# EAGLE board 8ModuleFinal (EAGLE 6.3), part 1 of 2
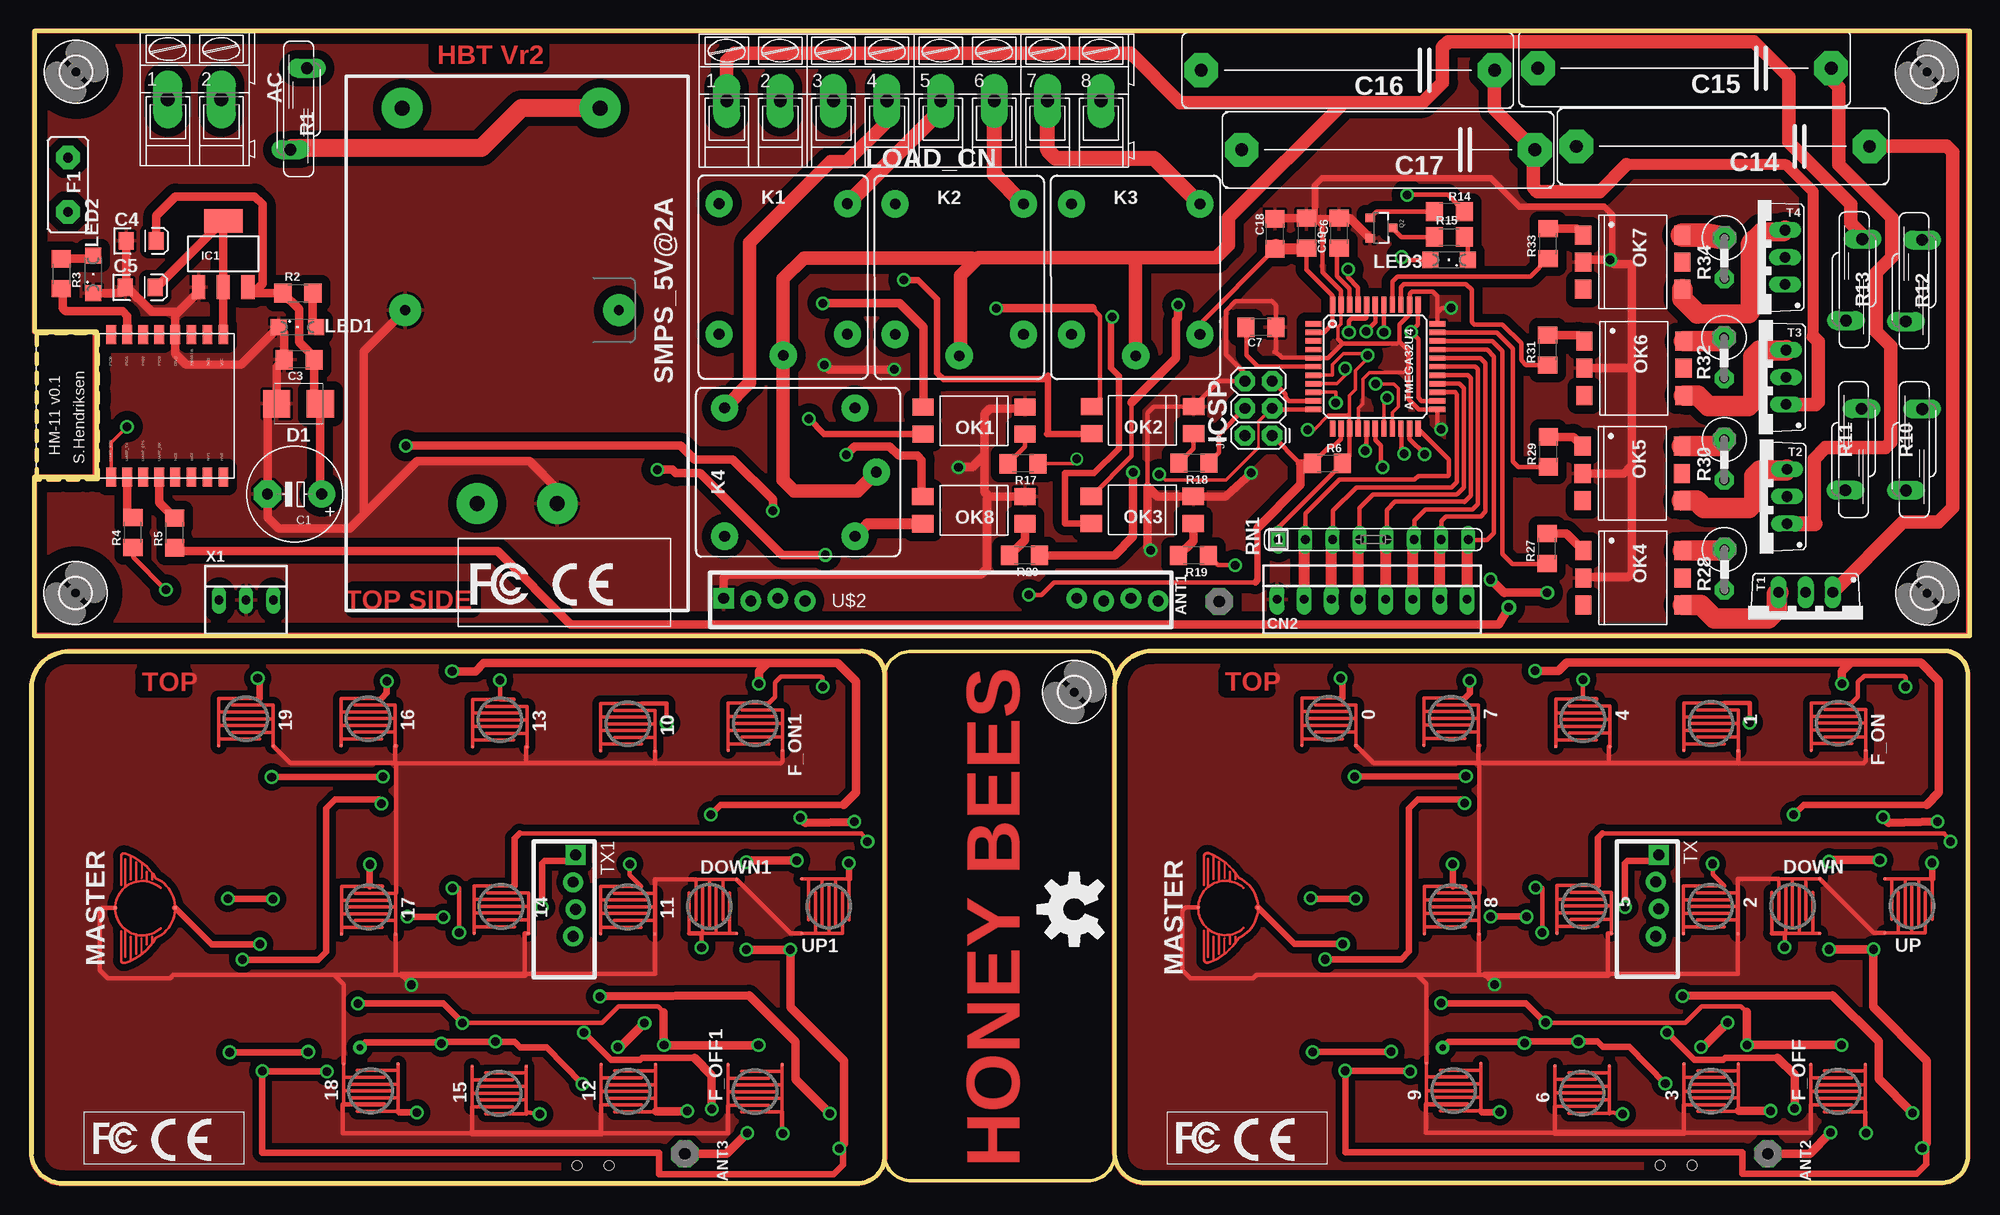
[diagram p0: board, top side]
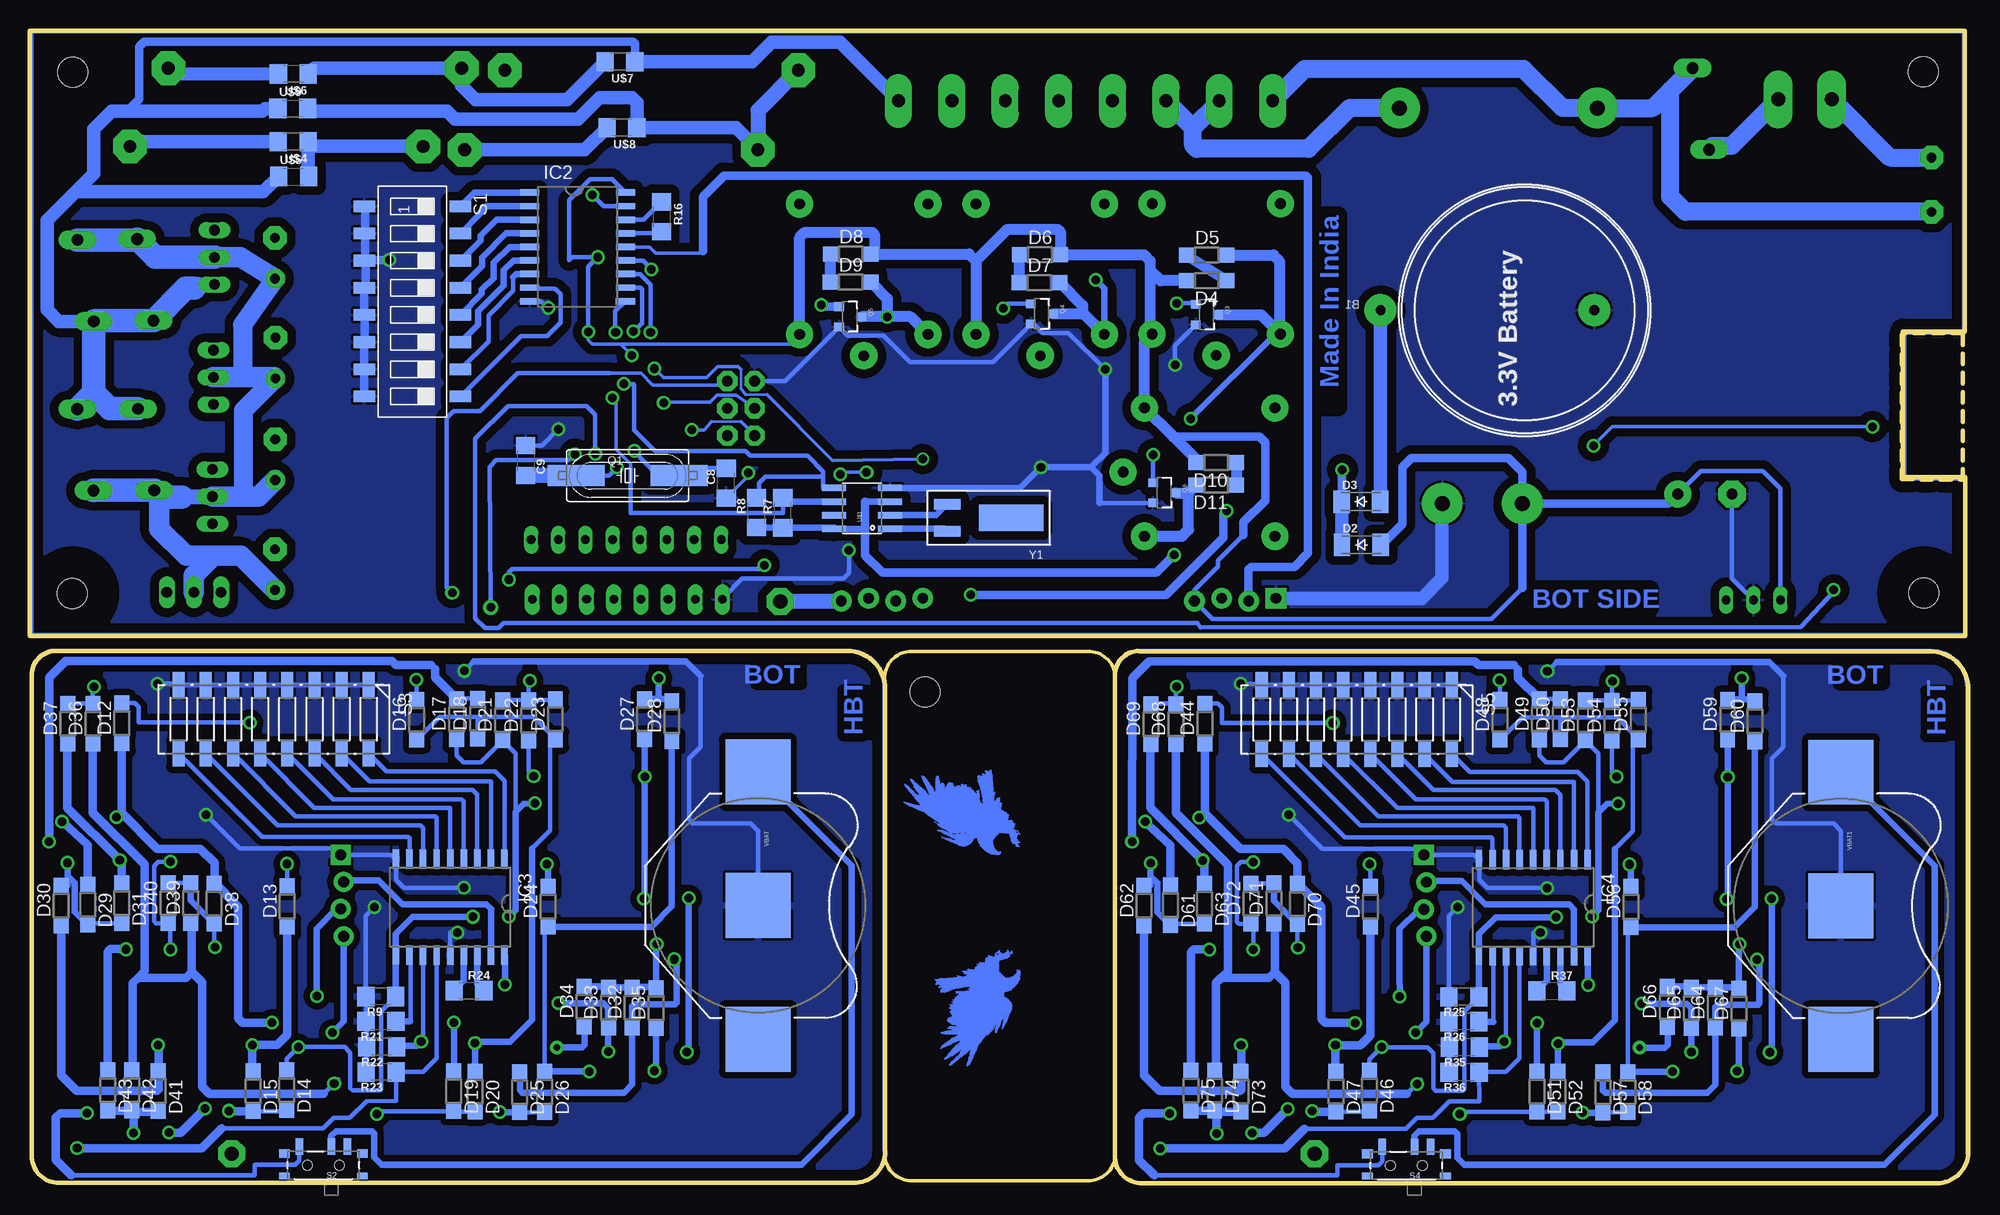
[diagram p1: board, bottom side, seen from below]

Size 181.29 x 107.82 mm. Coordinates in mm from the lower left corner, seen from the top.
Outline: 6.2,79.36 6.2,65.85 0.51,65.82 0.51,79.52 6.12,79.52
Outline: 0.36,107.82 181.29,107.82 181.29,51.17 0.29,51.17 0.29,66.07 6.11,66.07 6.11,79.67 0.31,79.67 0.31,107.8
Outline: 178.82,49.78 104.84,49.78 arc90 101.29,46.23 101.29,2.96 arc90 104.22,0.03 178.59,0.03 arc90 181.1,2.54 181.1,47.57 arc90 178.87,49.8
Outline: 77.53,49.75 3.55,49.75 arc90 0,46.21 0,2.93 arc90 2.93,0 77.3,0 arc90 79.81,2.51 79.81,47.54 arc90 77.58,49.77
Outline: 0.07,47.18 0.07,2.73
Outline: 79.77,47.21 arc-90 82.31,49.75 98.82,49.75 arc-90 101.36,47.21 101.36,2.76 arc-90 98.82,0.22 82.31,0.22 arc-90 79.77,2.76 79.77,47.21
Copper layers (1*16): Top 0.035mm / dielectric 1.5mm / Bottom 0.035mm
Design rules "default": minimum track width 10mil, minimum drill 24mil, track to track 8mil, track to pad 8mil, pad to pad 8mil, via to via 8mil, smd to smd 8mil, copper to edge 40mil, drill to drill 8mil, minimum pad ring 10mil, minimum via ring 8mil, stop-mask expansion 4mil, vias tented up to drill 0mil, thermal gap 10mil

## Footprints (pad centres in the part's own frame; a part is rotated, then mirrored left to right if it is on the bottom)
BUTTON-CONDUCTIVE = smd 0.203 x 0.203: 1 2.54,2.54; 2 2.54,-2.54
AK300/2 = drill 1.321 pad 2.7 long: 1 -2.515,0; 2 2.489,0
PAD-01 = drill 1.321 pad 2.54 octagon: 1 0,0
TQFP44 = smd 1.5 x 0.5: 1 -5.8,4; 2 -5.8,3.2; 3 -5.8,2.4; 4 -5.8,1.6; 5 -5.8,0.8; 6 -5.8,0; 7 -5.8,-0.8; 8 -5.8,-1.6; 9 -5.8,-2.4; 10 -5.8,-3.2; 11 -5.8,-4; 23 5.8,-4; 24 5.8,-3.2; 25 5.8,-2.4; 26 5.8,-1.6; 27 5.8,-0.8; 28 5.8,0; 29 5.8,0.8; 30 5.8,1.6; 31 5.8,2.4; 32 5.8,3.2; 33 5.8,4 | smd 0.5 x 1.5: 12 -4,-5.8; 13 -3.2,-5.8; 14 -2.4,-5.8; 15 -1.6,-5.8; 16 -0.8,-5.8; 17 0,-5.8; 18 0.8,-5.8; 19 1.6,-5.8; 20 2.4,-5.8; 21 3.2,-5.8; 22 4,-5.8; 34 4,5.8; 35 3.2,5.8; 36 2.4,5.8; 37 1.6,5.8; 38 0.8,5.8; 39 0,5.8; 40 -0.8,5.8; 41 -1.6,5.8; 42 -2.4,5.8; 43 -3.2,5.8; 44 -4,5.8
CR2032 = drill 0.9 pad 3: + 10,0; - -10,0
E5-8,5 = drill 1.016 pad 2.54: + -2.54,0 | drill 1.016 pad 2.54 octagon: - 2.54,0
1206 = smd 1.6 x 1.8: 1 -1.4,0; 2 1.4,0
EIA3216 = smd 1.4 x 1.6: A 1.4,0; C -1.4,0
C27.5B9 = drill 1.194 pad 3.15 octagon: 1 -13.716,0; 2 13.716,0
22-23-2081 = drill 0.8 pad 1.422 long: 1 -8.89,0; 2 -6.35,0; 3 -3.81,0; 4 -1.27,0; 5 1.27,0; 6 3.81,0; 7 6.35,0; 8 8.89,0
SMBJ = smd 2.54 x 2.54: A 2.04,0; C -2.03,0
SOD-123_MINI-SMA = smd 1.5 x 2.1: A 1.8,0; C -1.8,0
SOD123 = smd 1.4 x 1.4: A 1.9,0; C -1.9,0
2,8 = hole 2.8: 0,0
MF-5,1B = drill 0.914 pad 2.184 octagon: 1 -2.54,0; 2 2.54,0
SOT223 = smd 1.219 x 2.235: 1 -2.311,-3.099; 2 0,-3.099; 3 2.311,-3.099 | smd 3.6 x 2.2: 4 0,3.099
SOP18 = smd 0.6 x 1.8: 1 -5.08,-4.475; 2 -3.81,-4.475; 3 -2.54,-4.475; 4 -1.27,-4.475; 5 0,-4.475; 6 1.27,-4.475; 7 2.54,-4.475; 8 3.81,-4.475; 9 5.08,-4.475; 10 5.08,4.475; 11 3.81,4.5; 12 2.54,4.5; 13 1.27,4.5; 14 0,4.5; 15 -1.27,4.5; 16 -2.54,4.5; 17 -3.81,4.5; 18 -5.08,4.5
2X3 = drill 1.016 pad 1.88 octagon: 1 0,0; 2 0,2.54; 3 2.54,0; 4 2.54,2.54; 5 5.08,0; 6 5.08,2.54
JS-M = drill 1 pad 2.54: 1 6.7,6; 2 6.7,-6; C 8.7,0; NC -5.5,-6; NO -5.5,6
SML1206 = smd 1.5 x 1.5: A 1.75,0; C -1.75,0
AK300/8 = drill 1.2 pad 2.54 long: 1 -17.501,0; 2 -12.497,0; 3 -7.518,0; 4 -2.515,0; 5 2.515,0; 6 7.518,0; 7 12.497,0; 8 17.501,0
BUTTON-CONDUCTIVE-MINI = smd 0.254 x 0.254: 1 5.08,-0.559; 2 5.08,5.055
DIL4-SMD = smd 1.6 x 2: 1 -1.27,-4.77; 2 1.27,-4.77; 3 1.27,4.77; 4 -1.27,4.77
DIL6-SMD = smd 1.78 x 1.52: 1 -2.54,-4.645; 2 0,-4.645; 3 2.54,-4.645; 4 2.54,4.645; 5 0,4.645; 6 -2.54,4.645
HC49UP = smd 5.334 x 1.93: 1 -4.826,0; 2 4.826,0
SOT23-3 = smd 0.8 x 0.9: 1 -0.95,-1; 2 0.95,-1; 3 0,1.1
S10K11 = drill 1.1 pad 1.778 long: 1 -0.762,-3.81; 2 0.762,3.81
0411V = drill 0.914 pad 2.184 octagon: 1 -2.54,0 | drill 0.914 pad 1.778 octagon: 2 1.27,0
SIL8 = drill 0.813 long: 1 -8.89,0; 2 -6.35,0; 3 -3.81,0; 4 -1.27,0; 5 1.27,0; 6 3.81,0; 7 6.35,0; 8 8.89,0
SMS-008 = smd 1.092 x 2.007: 1 -8.89,-4.496; 2 -6.35,-4.496; 3 -3.81,-4.496; 4 -1.27,-4.496; 5 1.27,-4.496; 6 3.81,-4.496; 7 6.35,-4.496; 8 8.89,-4.496; 9 8.89,4.496; 10 6.35,4.496; 11 3.81,4.496; 12 1.27,4.496; 13 -1.27,4.496; 14 -3.81,4.496; 15 -6.35,4.496; 16 -8.89,4.496
SWITCH-SPST-SMD-A = smd 0.7 x 1.5: 1 -2.25,-1.75; 2 -0.75,-1.75; 3 2.25,-1.75 | smd 1 x 0.6: GND1 -3.65,1; GND3 3.65,1 | smd 1 x 0.8: GND2 -3.65,-1.1; GND4 3.65,-1.1 | hole 0.9: -1.5,0; 1.5,0
CTS-219-08J = smd 1.13 x 2.44: 1 -8.89,-3.215; 2 -6.35,-3.215; 3 -3.81,-3.215; 4 -1.27,-3.215; 5 1.27,-3.215; 6 3.81,-3.215; 7 6.35,-3.215; 8 8.89,-3.215; 9 8.89,3.215; 10 6.35,3.215; 11 3.81,3.215; 12 1.27,3.215; 13 -1.27,3.215; 14 -3.81,3.215; 15 -6.35,3.215; 16 -8.89,3.215
MKS1854-6-0-404 = drill 1.4 pad 3.81: 1 5.25,47; 2 23.75,47; 3 12.25,10; 4 19.75,10
TO220BV = drill 1 pad 1.422 long: G 2.54,-2.54; T1 -2.54,-2.54; T2 0,-2.54
RF-LINK_TX = drill 1.016 pad 1.88: ANT 7.62,-0.127; DATA 2.54,-0.127; VCC 5.08,0.127 | drill 1.016 pad 1.88 square: GND 0,0.127
SO08 = smd 0.61 x 2.21: 1 -1.905,-2.616; 2 -0.635,-2.616; 3 0.635,-2.616; 4 1.905,-2.616; 5 1.905,2.616; 6 0.635,2.616; 7 -0.635,2.616; 8 -1.905,2.616
RF-LINK_RX = drill 1 pad 1.93: +5V@1 7.62,-0.127; +5V@2 33.02,0.127; ANT 40.64,-0.127; DATA@1 2.54,-0.127; DATA@2 5.08,0.127; GND@2 35.56,-0.127; GND@3 38.1,0.127 | drill 1 pad 1.93 square: GND@1 0,0.127
HM-11 = smd 1.778 x 0.914: GND 7.508,-0.6; NC1 -5.808,-0.6; NC2 -5.808,-2.1; NC3 7.508,-3.6; NV1 -5.808,-3.6; NV2 -5.808,-5.1; PIO0 7.508,5.4; PIO1 7.508,3.9; PIO2 7.508,2.4; PIO3 7.508,0.9; RESETB 7.508,-2.1; UART_CTS -5.808,2.4; UART_RTS -5.808,5.4; UART_RX -5.808,0.9; UART_TX -5.808,3.9; VCC 7.508,-5.1
BATTCON_20MM = smd 6.07 x 6.07: 1 -12.5,0; 2 0,0; 3 12.5,0
22-23-2031 = drill 0.8 pad 1.27 long: 1 -2.54,0; 2 0,0; 3 2.54,0
CRYSTAL_CYL_2X6MM_SMT = smd 2.5 x 1: 1 2.125,1.27; 2 2.125,-1.27 | smd 6 x 2.5: CYLINDER -3.875,0

## Placement (x,y rotation side)
0  BUTTON-CONDUCTIVESMD  [BUTTON-CONDUCTIVE]  121.37,43.47 270 top
1  BUTTON-CONDUCTIVESMD  [BUTTON-CONDUCTIVE]  157.09,43 270 top
2  BUTTON-CONDUCTIVESMD  [BUTTON-CONDUCTIVE]  157.07,25.88 270 top
3  BUTTON-CONDUCTIVESMD  [BUTTON-CONDUCTIVE]  157.12,8.62 90 top
4  BUTTON-CONDUCTIVESMD  [BUTTON-CONDUCTIVE]  145.11,43.37 270 top
5  BUTTON-CONDUCTIVESMD  [BUTTON-CONDUCTIVE]  145.24,25.93 270 top
6  BUTTON-CONDUCTIVESMD  [BUTTON-CONDUCTIVE]  145.05,8.44 90 top
7  BUTTON-CONDUCTIVESMD  [BUTTON-CONDUCTIVE]  132.79,43.49 270 top
8  BUTTON-CONDUCTIVESMD  [BUTTON-CONDUCTIVE]  132.84,25.87 270 top
9  BUTTON-CONDUCTIVESMD  [BUTTON-CONDUCTIVE]  133.04,8.66 90 top
10  BUTTON-CONDUCTIVESMD  [BUTTON-CONDUCTIVE]  55.8,42.97 270 top
11  BUTTON-CONDUCTIVESMD  [BUTTON-CONDUCTIVE]  55.78,25.86 270 top
12  BUTTON-CONDUCTIVESMD  [BUTTON-CONDUCTIVE]  55.83,8.59 90 top
13  BUTTON-CONDUCTIVESMD  [BUTTON-CONDUCTIVE]  43.82,43.34 270 top
14  BUTTON-CONDUCTIVESMD  [BUTTON-CONDUCTIVE]  43.95,25.9 270 top
15  BUTTON-CONDUCTIVESMD  [BUTTON-CONDUCTIVE]  43.76,8.41 90 top
16  BUTTON-CONDUCTIVESMD  [BUTTON-CONDUCTIVE]  31.51,43.46 270 top
17  BUTTON-CONDUCTIVESMD  [BUTTON-CONDUCTIVE]  31.55,25.84 270 top
18  BUTTON-CONDUCTIVESMD  [BUTTON-CONDUCTIVE]  31.75,8.64 90 top
19  BUTTON-CONDUCTIVESMD  [BUTTON-CONDUCTIVE]  20.08,43.45 270 top
AC  [AK300/2]  15.29,101.39 0 top
ANT1  [PAD-01]  111.1,54.41 90 top
ANT2  [PAD-01]  162.41,2.77 270 top
ANT3  [PAD-01]  61.13,2.74 270 top
ATMEGA32U4  ATMEGA32U4TQFP-44  [TQFP44]  125.7,76.38 0 top
B1  [CR2032]  44.97,81.66 0 top
C1  470uF/25V  [E5-8,5]  24.63,64.45 180 top
C3  0.1uF  [1206]  25.05,77.03 180 top
C4  10uF  [EIA3216]  10.29,88.15 0 top
C5  10uF  [EIA3216]  10.21,83.8 0 top
C6  0.1uF  [1206]  122.32,88.87 90 top
C7  1uF  [1206]  115,80.06 180 top
C8  18pF  [1206]  116.16,65.47 90 bottom
C9  18pF  [1206]  134.93,67.59 270 bottom
C14  2.2uF/250VAC  [C27.5B9]  158.22,96.99 180 top
C15  3.3uF/250VAC  [C27.5B9]  154.62,104.29 180 top
C16  2.2uF/250VAC  [C27.5B9]  123.14,104.11 180 top
C17  3.3uF/250VAC  [C27.5B9]  126.91,96.66 180 top
C18  0.1uF  [1206]  116.31,88.8 90 top
C19  0.1uF  [1206]  119.28,88.88 270 top
CN2  Capsense I/P  [22-23-2081]  125.41,54.61 0 top
D1  [SMBJ]  25.01,72.91 180 top
D2  CGRM4007-G  [SOD-123_MINI-SMA]  56.76,59.71 0 bottom
D3  CGRM4007-G  [SOD-123_MINI-SMA]  56.8,63.76 0 bottom
D4  [SOD123]  71.21,84.4 180 bottom
D5  [SOD123]  71.22,86.82 0 bottom
D6  [SOD123]  86.82,86.84 0 bottom
D7  [SOD123]  86.86,84.23 0 bottom
D8  [SOD123]  104.5,86.91 0 bottom
D9  [SOD123]  104.53,84.27 0 bottom
D10  [SOD123]  70.35,67.39 180 bottom
D11  [SOD123]  70.35,65.33 180 bottom
D12  [SOD123]  172.69,43.02 90 bottom
D13  [SOD123]  157.21,25.89 90 bottom
D14  [SOD123]  157.28,8.7 270 bottom
D15  [SOD123]  160.42,8.61 270 bottom
D16  [SOD123]  145.1,43.37 90 bottom
D17  [SOD123]  141.39,43.41 90 bottom
D18  [SOD123]  139.42,43.44 90 bottom
D19  [SOD123]  141.63,8.61 270 bottom
D20  [SOD123]  139.65,8.59 270 bottom
D21  [SOD123]  137.09,43.32 90 bottom
D22  [SOD123]  134.64,43.29 90 bottom
D23  [SOD123]  132.14,43.38 90 bottom
D24  [SOD123]  132.83,25.87 90 bottom
D25  [SOD123]  135.48,8.53 270 bottom
D26  [SOD123]  133.14,8.55 270 bottom
D27  [SOD123]  123.8,43.39 90 bottom
D28  [SOD123]  121.25,43.22 90 bottom
D29  [SOD123]  175.88,26.05 270 bottom
D30  [SOD123]  178.36,25.97 90 bottom
D31  [SOD123]  172.71,26.19 270 bottom
D32  [SOD123]  124.95,16.44 90 bottom
D33  [SOD123]  127.18,16.43 90 bottom
D34  [SOD123]  129.45,16.52 90 bottom
D35  [SOD123]  122.73,16.37 90 bottom
D36  [SOD123]  175.38,42.98 90 bottom
D37  [SOD123]  177.74,42.98 90 bottom
D38  [SOD123]  164.04,26.15 270 bottom
D39  [SOD123]  166.24,26.2 90 bottom
D40  [SOD123]  168.36,26.18 90 bottom
D41  [SOD123]  169.29,8.6 270 bottom
D42  [SOD123]  171.76,8.69 270 bottom
D43  [SOD123]  174,8.69 270 bottom
D44  [SOD123]  71.41,42.99 90 bottom
D45  [SOD123]  55.92,25.87 90 bottom
D46  [SOD123]  56,8.68 270 bottom
D47  [SOD123]  59.13,8.59 270 bottom
D48  [SOD123]  43.81,43.35 90 bottom
D49  [SOD123]  40.1,43.38 90 bottom
D50  [SOD123]  38.13,43.41 90 bottom
D51  [SOD123]  40.34,8.58 270 bottom
D52  [SOD123]  38.36,8.56 270 bottom
D53  [SOD123]  35.8,43.29 90 bottom
D54  [SOD123]  33.35,43.26 90 bottom
D55  [SOD123]  30.85,43.35 90 bottom
D56  [SOD123]  31.54,25.85 90 bottom
D57  [SOD123]  34.19,8.51 270 bottom
D58  [SOD123]  31.85,8.52 270 bottom
D59  [SOD123]  22.51,43.37 90 bottom
D60  [SOD123]  19.96,43.2 90 bottom
D61  [SOD123]  74.59,26.02 270 bottom
D62  [SOD123]  77.07,25.95 90 bottom
D63  [SOD123]  71.43,26.16 270 bottom
D64  [SOD123]  23.66,16.42 90 bottom
D65  [SOD123]  25.89,16.4 90 bottom
D66  [SOD123]  28.16,16.49 90 bottom
D67  [SOD123]  21.44,16.34 90 bottom
D68  [SOD123]  74.1,42.95 90 bottom
D69  [SOD123]  76.45,42.95 90 bottom
D70  [SOD123]  62.75,26.12 270 bottom
D71  [SOD123]  64.96,26.17 90 bottom
D72  [SOD123]  67.08,26.15 90 bottom
D73  [SOD123]  68,8.58 270 bottom
D74  [SOD123]  70.48,8.67 270 bottom
D75  [SOD123]  72.71,8.67 270 bottom
DOWN  BUTTON-CONDUCTIVESMD  [BUTTON-CONDUCTIVE]  164.71,25.92 0 top
DOWN1  BUTTON-CONDUCTIVESMD  [BUTTON-CONDUCTIVE]  63.43,25.89 0 top
E$1  [EAGLE-TOP-8MM]  88.66,30.7 90 bottom
E$2  [EAGLE-TOP-8MM]  88.66,21.81 180 bottom
E$3  [2,8]  97.55,45.94 0 top
E$4  [OSHW-LOGO-L]  97.55,25.62 90 top
F1  PFUSE 1A  [MF-5,1B]  3.43,93.4 90 top
F_OFF  BUTTON-CONDUCTIVESMD  [BUTTON-CONDUCTIVE]  168.98,8.59 90 top
F_OFF1  BUTTON-CONDUCTIVESMD  [BUTTON-CONDUCTIVE]  67.7,8.56 90 top
F_ON  BUTTON-CONDUCTIVESMD  [BUTTON-CONDUCTIVE]  169.01,43.04 270 top
F_ON1  BUTTON-CONDUCTIVESMD  [BUTTON-CONDUCTIVE]  67.73,43.01 270 top
H1  MOUNT-HOLE2.8  [2,8]  4.19,103.95 0 top
H2  MOUNT-HOLE2.8  [2,8]  4.14,55.21 0 top
H3  MOUNT-HOLE2.8  [2,8]  177.3,103.94 0 top
H4  MOUNT-HOLE2.8  [2,8]  177.31,55.18 0 top
IC1  [SOT223]  17.95,86.94 0 top
IC2  HT680D  [SOP18]  130.06,87.58 270 bottom
IC3  HT680D  [SOP18]  141.98,25.83 180 bottom
IC4  HT680D  [SOP18]  40.69,25.8 180 bottom
JP1  AVR_SPI_PRG_6PTH  [2X3]  116.06,69.94 90 top
K1  JS-M1-9V-4  [JS-M]  70.33,86.13 270 top
K2  JS-M1-9V-4  [JS-M]  86.8,86.1 270 top
K3  JS-M1-9V-4  [JS-M]  103.29,86.1 270 top
K4  JS-M1-9V-4  [JS-M]  70.34,66.52 0 top
LED1  [SML1206]  24.89,80.08 0 top
LED2  [SML1206]  5.78,85.02 90 top
LED3  [SML1206]  132.6,86.36 180 top
LOAD_CN  [AK300/8]  82.55,101.24 0 top
MASTER  BUTTON-CONDUCTIVE  [BUTTON-CONDUCTIVE-MINI]  109.69,30.86 270 top
MASTER1  BUTTON-CONDUCTIVE  [BUTTON-CONDUCTIVE-MINI]  8.4,30.83 270 top
OK1  PC817DIL4  [DIL4-SMD]  88.17,71.33 90 top
OK2  PC817DIL4  [DIL4-SMD]  103.95,71.37 90 top
OK3  PC817DIL4  [DIL4-SMD]  103.91,62.98 90 top
OK4  MOC3031S  [DIL6-SMD]  149.81,56.63 270 top
OK5  MOC3031S  [DIL6-SMD]  149.73,66.39 270 top
OK6  MOC3031S  [DIL6-SMD]  149.89,76.23 270 top
OK7  MOC3031S  [DIL6-SMD]  149.78,86.16 270 top
OK8  PC817DIL4  [DIL4-SMD]  88.17,62.95 90 top
Q1  16MHz  [HC49UP]  125.38,66.19 0 bottom
Q2  MMBT2222A  [SOT23-3]  126.21,89.34 270 top
Q3  MMBT2222A  [SOT23-3]  71.24,81.25 270 bottom
Q4  MMBT2222A  [SOT23-3]  86.67,81.31 270 bottom
Q5  MMBT2222A  [SOT23-3]  104.61,81.05 270 bottom
Q6  MMBT2222A  [SOT23-3]  75.23,64.58 270 bottom
R1  MOV300V  [S10K11]  25.01,100.49 0 top
R2  1K  [1206]  24.94,83.25 0 top
R3  1K  [1206]  2.81,85.06 270 top
R4  1K  [1206]  9.51,60.88 90 top
R5  1K  [1206]  13.43,60.83 90 top
R6  10K  [1206]  121.24,67.33 0 top
R7  4k7  [1206]  110.87,62.71 90 bottom
R8  4k7  [1206]  113.33,62.72 90 bottom
R9  1K  [1206]  148.46,17.46 180 bottom
R10  S10K11  [S10K11]  176.09,68.61 180 top
R11  S10K11  [S10K11]  170.42,68.63 180 top
R12  S10K11  [S10K11]  176.08,84.42 0 top
R13  S10K11  [S10K11]  170.49,84.51 0 top
R14  10K  [1206]  132.64,90.88 0 top
R15  560R  [1206]  132.62,88.51 0 top
R16  33k  [1206]  122.2,90.39 270 bottom
R17  1K  [1206]  92.76,67.3 180 top
R18  1K  [1206]  108.75,67.36 180 top
R19  1K  [1206]  108.7,58.7 180 top
R20  1K  [1206]  92.91,58.73 180 top
R21  1K  [1206]  148.46,15.14 180 bottom
R22  1K  [1206]  148.4,12.75 180 bottom
R23  1K  [1206]  148.44,10.4 180 bottom
R24  750K  [1206]  140.22,18.02 0 bottom
R25  1K  [1206]  47.17,17.43 180 bottom
R26  1K  [1206]  47.17,15.11 180 bottom
R27  560R  [1206]  141.77,59.37 90 top
R28  470R/0.5W  [0411V]  158.36,56.75 270 top
R29  560R  [1206]  141.89,68.41 90 top
R30  470R/0.5W  [0411V]  158.34,67.03 270 top
R31  560R  [1206]  141.83,77.94 90 top
R32  470R/0.5W  [0411V]  158.32,76.55 270 top
R33  560R  [1206]  141.86,87.89 90 top
R34  470R/0.5W  [0411V]  158.36,85.88 270 top
R35  1K  [1206]  47.11,12.72 180 bottom
R36  1K  [1206]  47.15,10.38 180 bottom
R37  750K  [1206]  38.94,17.99 0 bottom
RN1  [SIL8]  125.52,60.2 0 top
S1  SWS008  [SMS-008]  145.51,82.48 270 bottom
S2  [SWITCH-SPST-SMD-A]  153.84,1.68 180 bottom
S3  219-08J  [CTS-219-08J]  158.48,43.4 180 bottom
S4  [SWITCH-SPST-SMD-A]  52.55,1.65 180 bottom
S5  219-08J  [CTS-219-08J]  57.19,43.37 180 bottom
SMPS_5V@2A  5V@2A  [MKS1854-6-0-404]  29.44,53.57 0 top
T1  BTB16-V  [TO220BV]  165.94,52.74 180 top
T2  BTB16-V  [TO220BV]  161.66,64.23 90 top
T3  BTB16-V  [TO220BV]  161.59,75.39 90 top
T4  BTB16-V  [TO220BV]  161.48,86.61 90 top
TX  RF-LINK_TX  [RF-LINK_TX]  152.08,30.72 270 top
TX1  RF-LINK_TX  [RF-LINK_TX]  50.79,30.7 270 top
U$1  DS1307SO8  [SO08]  103.46,63.12 90 bottom
U$2  RF-LINK_RX  [RF-LINK_RX]  64.75,54.58 0 top
U$3  HM-11  [HM-11]  12.88,71.88 90 top
U$4  220K  [1206]  156.66,97.41 180 bottom
U$5  2E2  [1206]  156.63,94.16 0 bottom
U$6  220K  [1206]  156.64,103.76 180 bottom
U$7  2E2  [1206]  126.1,104.9 180 bottom
U$8  220K  [1206]  125.92,98.73 180 bottom
U$9  2E2  [1206]  156.69,100.52 0 bottom
U$10  [CE-4MM]  112.51,2.06 0 top
U$11  [FCC_6.1X15MM]  106.21,1.73 0 top
U$12  [FCC_20X8.35MM]  39.86,52.03 0 top
U$13  [CE-4MM]  48.75,53.99 0 top
U$14  [CE-4MM]  11.22,2.03 0 top
U$15  [FCC_6.1X15MM]  4.93,1.71 0 top
UP  BUTTON-CONDUCTIVESMD  [BUTTON-CONDUCTIVE]  175.89,25.94 180 top
UP1  BUTTON-CONDUCTIVESMD  [BUTTON-CONDUCTIVE]  74.6,25.92 180 top
VBAT  [BATTCON_20MM]  113.2,25.98 270 bottom
VBAT1  [BATTCON_20MM]  11.91,25.95 270 bottom
X1  22-23-2031  [22-23-2031]  20.1,54.55 0 top
Y1  32.768KHz  [CRYSTAL_CYL_2X6MM_SMT]  93.37,62.24 180 bottom

## Library data of the parts
0 1-19 DOWN DOWN1 F_OFF F_OFF1 F_ON F_ON1 MASTER MASTER1 S2 S4 UP UP1 VBAT VBAT1 = SparkFun-Electromechanical
AC LOAD_CN = con-ptr500; OC_FARNELL: unknown; OC_NEWARK: unknown
ANT1-ANT3 = discrete
ATMEGA32U4 = SparkFun-DigitalIC
B1 Y1 = microbuilder
C1 R28 R30 R32 R34 = rcl
C3 = SparkFun-Capacitors; PROD_ID: CAP-09822; VALUE: 1.0uF
C4 C5 = SparkFun-Capacitors; PROD_ID: CAP-00811
C6-C9 C18 C19 R3 R6-R9 R14 R21-R26 R35-R37 = SparkFun-Passives
C14-C17 = capacitor-wima
CN2 = con-molex; MF: MOLEX; MPN: 22-23-2081; OC_FARNELL: 1756826; OC_NEWARK: 01C7592
D1-D75 = diode
E$1 E$2 U$10-U$15 = logo
E$3 H1-H4 = holes
E$4 = SparkFun-Aesthetics
F1 = bourns
IC1 = SparkFun-PowerIC; PROD_ID: VREG-08170
IC2-IC4 = holtek; OC_FARNELL: unknown; OC_NEWARK: unknown
JP1 = SparkFun-Connectors
K1-K4 = relay; OC_FARNELL: unknown; OC_NEWARK: unknown
LED1-LED3 = led
OK1-OK3 OK8 = optocoupler
OK4-OK7 = optocoupler; MF: FAIRCHILD SEMICONDUCTOR; MPN: MOC3031SM; OC_FARNELL: unknown; OC_NEWARK: 34C1335
Q1 = crystal; OC_FARNELL: unknown; OC_NEWARK: unknown
Q2-Q6 = SparkFun-DiscreteSemi; PROD_ID: TRANS-08049
R1 R10-R13 = varistor
R2 R4 R5 R15-R20 R27 R29 R31 R33 U$4-U$9 = SparkFun-Resistors
RN1 = resistor-sil; OC_FARNELL: unknown; OC_NEWARK: unknown
S1 = smd-special
S3 S5 = switch-dil; OC_FARNELL: unknown; OC_NEWARK: unknown
SMPS_5V@2A = Morsun-con-stocko; OC_FARNELL: 1141862; OC_NEWARK: unknown
T1-T4 = triac
TX TX1 U$2 = SparkFun-RF
U$1 = SparkFun-FreqCtrl
U$3 = HM-11
X1 = con-molex; MF: MOLEX; MPN: 22-23-2031; OC_FARNELL: 1462950; OC_NEWARK: 30C0862

## Nets
!RESET: ATMEGA32U4.13 JP1.1 R6.1 U$3.UART_RTS
(DIN)TE: IC2.14 U$2.DATA@1
(VT)ADOUT: IC2.17 R14.2
+3V3: C5.A IC1.2 IC1.4 U$3.VCC
+5V: ATMEGA32U4.2 ATMEGA32U4.7 ATMEGA32U4.14 ATMEGA32U4.24 ATMEGA32U4.34 ATMEGA32U4.44 C1.+ C3.1 C4.A C18.1 C19.2 D1.C D2.A D4.A D6.A D8.A D10.A IC1.3 IC2.18 JP1.2 K1.1 K2.1 K3.1 K4.1 LED3.A R2.1 R6.2 RN1.1 SMPS_5V@2A.3 U$2.+5V@1 X1.1
A0: IC2.1 S1.16
A1: IC2.2 S1.15
A2: IC2.3 S1.14
A3: IC2.4 S1.13
A4: IC2.5 S1.12
A5: IC2.6 S1.11
A6: IC2.7 S1.10
A7: IC2.8 S1.9
BLE_STATUS: R3.2 U$3.PIO1
D8: ATMEGA32U4.38 IC2.10
D9: ATMEGA32U4.39 IC2.11
D10: ATMEGA32U4.40 IC2.12
D11: ATMEGA32U4.41 IC2.13
DOWN: ATMEGA32U4.29 CN2.7 RN1.7
EA0: IC3.1 S3.16
EA1: IC3.2 S3.15
EA2: IC3.3 S3.14
EA3: IC3.4 S3.13
EA4: IC3.5 S3.12
EA5: IC3.6 S3.11
EA6: IC3.7 S3.10
EA7: IC3.8 S3.9
EA8: IC4.1 S5.16
EA9: IC4.2 S5.15
EA10: IC4.3 S5.14
EA11: IC4.4 S5.13
EA12: IC4.5 S5.12
EA13: IC4.6 S5.11
EA14: IC4.7 S5.10
EA15: IC4.8 S5.9
EAD1: D44.C D46.C D49.C D53.C D57.C D61.C D64.C D70.C IC4.10 R25.1
EAD2: IC4.11 R26.1
EAD3: D48.C D50.C D52.C D55.C D66.C D68.C D71.C D74.C IC4.12 R35.1
EAD4: D56.C D58.C D60.C D63.C D67.C D69.C D72.C D75.C IC4.13 R36.1
EAD8: D12.C D14.C D17.C D21.C D25.C D29.C D32.C D38.C IC3.10 R9.1
EAD9: IC3.11 R21.1
EAD10: D16.C D18.C D20.C D23.C D34.C D36.C D39.C D42.C IC3.12 R22.1
EAD11: D24.C D26.C D28.C D31.C D35.C D37.C D40.C D43.C IC3.13 R23.1
EDOUT: IC3.17 TX.DATA
EDOUT1: IC4.17 TX1.DATA
EOSC1: IC3.16 R24.2
EOSC2: IC3.15 R24.1
EOSC3: IC4.15 R37.1
EOSC4: IC4.16 R37.2
FAN_ON/OFF: ATMEGA32U4.30 CN2.8 RN1.8
FAN_REG: LOAD_CN.8 R10.1 R11.1 R12.1 R13.1 T4.T1 U$5.1 U$7.1 U$9.1
GND: ATMEGA32U4.5 ATMEGA32U4.15 ATMEGA32U4.23 ATMEGA32U4.33 ATMEGA32U4.35 ATMEGA32U4.43 B1.- C1.- C3.2 C4.C C5.C C6.2 C7.1 C8.1 C9.1 C18.2 C19.1 CN2.1 D1.A IC1.1 IC2.9 JP1.6 LED1.C LED2.C OK1.2 OK2.2 OK3.2 OK4.2 OK5.2 OK6.2 OK7.2 OK8.2 Q2.2 Q3.2 Q4.2 Q5.2 Q6.2 S1.1 S1.2 S1.3 S1.4 S1.5 S1.6 S1.7 S1.8 SMPS_5V@2A.4 U$1.4 U$2.GND@1 U$3.GND X1.2
GNDA: IC3.9 IC3.14 R9.2 R21.2 R22.2 R23.2 S3.1 S3.2 S3.3 S3.4 S3.5 S3.6 S3.7 S3.8 TX.GND VBAT.2
GNDA1: IC4.9 IC4.14 R25.2 R26.2 R35.2 R36.2 S5.1 S5.2 S5.3 S5.4 S5.5 S5.6 S5.7 S5.8 TX1.GND VBAT1.2
LEVEL1: ATMEGA32U4.31 R27.1
LEVEL2: ATMEGA32U4.32 R29.1
LEVEL3: ATMEGA32U4.36 R31.1
LEVEL4: ATMEGA32U4.37 R33.1
LINE: F1.1 K1.C K2.C K3.C K4.C LOAD_CN.1 R1.2 R10.2 R11.2 R12.2 R13.2 R28.2 R30.2 R32.2 R34.2 SMPS_5V@2A.1 T1.T2 T2.T2 T3.T2 T4.T2
LOAD_1: K4.NO LOAD_CN.4
LOAD_2: K1.NO LOAD_CN.5
LOAD_3: K2.NO LOAD_CN.6
MISO: ATMEGA32U4.11 JP1.3 R20.1
MOSI: ATMEGA32U4.10 JP1.5 R19.1
N$1: OK6.1 R31.2
N$2: OK4.1 R27.2
N$3: OK5.1 R29.2
N$4: OK4.6 R28.1
N$5: OK7.1 R33.2
N$6: R4.2 U$3.UART_TX
N$7: ATMEGA32U4.6 C7.2
N$8: Q2.1 R14.1
N$9: LED2.A R3.1
N$10: ATMEGA32U4.42 C6.1
N$11: R5.2 U$3.UART_RX
N$12: U$1.1 Y1.1
N$13: U$1.2 Y1.2
N$14: D2.C D3.C R7.1 R8.1 U$1.3 U$1.8
N$15: LED1.A R2.2
N$16: B1.+ D3.A
N$17: 1.2 D12.A
N$18: 2.2 D13.A
N$19: U$1.7
N$20: ATMEGA32U4.1
N$22: ATMEGA32U4.16 C8.2 Q1.2
N$23: ATMEGA32U4.17 C9.2 Q1.1
N$24: Q2.3 R15.1
N$26: S2.2 VBAT.1
N$27: LED3.C R15.2
N$28: S2.3 TX.VCC
N$29: OK5.6 R30.1
N$30: OK6.6 R32.1
N$31: ANT1.1 U$2.ANT
N$32: OK1.3 Q3.1
N$33: D5.A K1.2 OK1.4 Q3.3
N$34: OK7.6 R34.1
N$35: 3.2 D14.A D15.A
N$36: AC.1 F1.2
N$37: D4.C D5.C
N$38: K1.NC
N$40: ANT2.1 TX.ANT
N$41: OK1.1 R17.2
N$42: 4.2 D16.A
N$43: OK2.3 Q4.1
N$44: 5.2 D17.A D18.A
N$45: D7.A K2.2 OK2.4 Q4.3
N$46: D6.C D7.C
N$47: K2.NC
N$48: 6.2 D19.A D20.A
N$49: 7.2 D21.A D22.A D23.A
N$50: OK2.1 R18.2
N$51: OK3.3 Q5.1
N$52: 0.2 D27.A D28.A
N$53: D9.A K3.2 OK3.4 Q5.3
N$54: OK4.4 T1.G
N$55: C14.1 T1.T1 U$4.2
N$56: C14.2 U$4.1 U$5.2
N$57: D8.C D9.C
N$58: K3.NC
N$59: D13.C D15.C D19.C D22.C D27.C D30.C D33.C D41.C
N$60: D29.A D30.A D31.A UP.2
N$61: 8.2 D24.A
N$62: OK5.4 T2.G
N$63: C15.1 T2.T1 U$6.2
N$64: C15.2 U$6.1 U$7.2
N$65: OK3.1 R19.2
N$66: OK8.3 Q6.1
N$67: D11.A K4.2 OK8.4 Q6.3
N$68: D36.A D37.A F_ON.2
N$69: D10.C D11.C
N$70: OK6.4 T3.G
N$71: C16.1 C17.1 T3.T1 U$8.2
N$72: C16.2 C17.2 U$8.1 U$9.2
N$73: K4.NC
N$74: 9.2 D25.A D26.A
N$75: D38.A D39.A D40.A DOWN.2
N$76: D32.A D33.A D34.A D35.A MASTER.2
N$77: OK8.1 R20.2
N$78: OK7.4 T4.G
N$79: D41.A D42.A D43.A F_OFF.2
N$81: S4.2 VBAT1.1
N$82: S4.3 TX1.VCC
N$83: ATMEGA32U4.8 R17.1
N$84: ANT3.1 TX1.ANT
N$85: 10.2 D44.A
N$86: 11.2 D45.A
N$87: 12.2 D46.A D47.A
N$88: 13.2 D48.A
N$89: 14.2 D49.A D50.A
N$90: 15.2 D51.A D52.A
N$91: D45.C D47.C D51.C D54.C D59.C D62.C D65.C D73.C
N$92: 16.2 D53.A D54.A D55.A
N$93: 17.2 D56.A
N$94: 18.2 D57.A D58.A
N$95: 19.2 D59.A D60.A
N$96: D64.A D65.A D66.A D67.A MASTER1.2
N$97: D61.A D62.A D63.A UP1.2
N$98: D68.A D69.A F_ON1.2
N$99: D70.A D71.A D72.A DOWN1.2
N$100: D73.A D74.A D75.A F_OFF1.2
NEUTRAL: AC.2 LOAD_CN.2 LOAD_CN.3 R1.1 SMPS_5V@2A.2
OSC1: IC2.16 R16.1
OSC2: IC2.15 R16.2
PLUG_CONTROL: K3.NO LOAD_CN.7
RX: ATMEGA32U4.21 R5.1
SCK: ATMEGA32U4.9 JP1.4 R18.1
SCL: ATMEGA32U4.18 R7.2 U$1.6
SDA: ATMEGA32U4.19 R8.2 U$1.5
SW-1: ATMEGA32U4.22 CN2.2 RN1.2
SW-2: ATMEGA32U4.25 CN2.3 RN1.3
SW-3: ATMEGA32U4.26 CN2.4 RN1.4
SW-4: ATMEGA32U4.27 CN2.5 RN1.5
TX: ATMEGA32U4.20 R4.1
UP: ATMEGA32U4.28 CN2.6 RN1.6
V+: 0.1 1.1 2.1 3.1 4.1 5.1 6.1 7.1 8.1 9.1 DOWN.1 F_OFF.1 F_ON.1 IC3.18 MASTER.1 UP.1
V+1: 10.1 11.1 12.1 13.1 14.1 15.1 16.1 17.1 18.1 19.1 DOWN1.1 F_OFF1.1 F_ON1.1 IC4.18 MASTER1.1 UP1.1